# Altium PCB Lucido.PcbDoc
Units mm, origin at the board's own origin, x right, y up, seen from the top; angles counter-clockwise.
Board outline 50 x 50 mm, 4 copper layers (L1 (Signal), L2 (GND), L3 (GND), L4 (Signal)), stack 1.586 mm thick; 70 components, 50 nets, 241 pads, 202 vias.
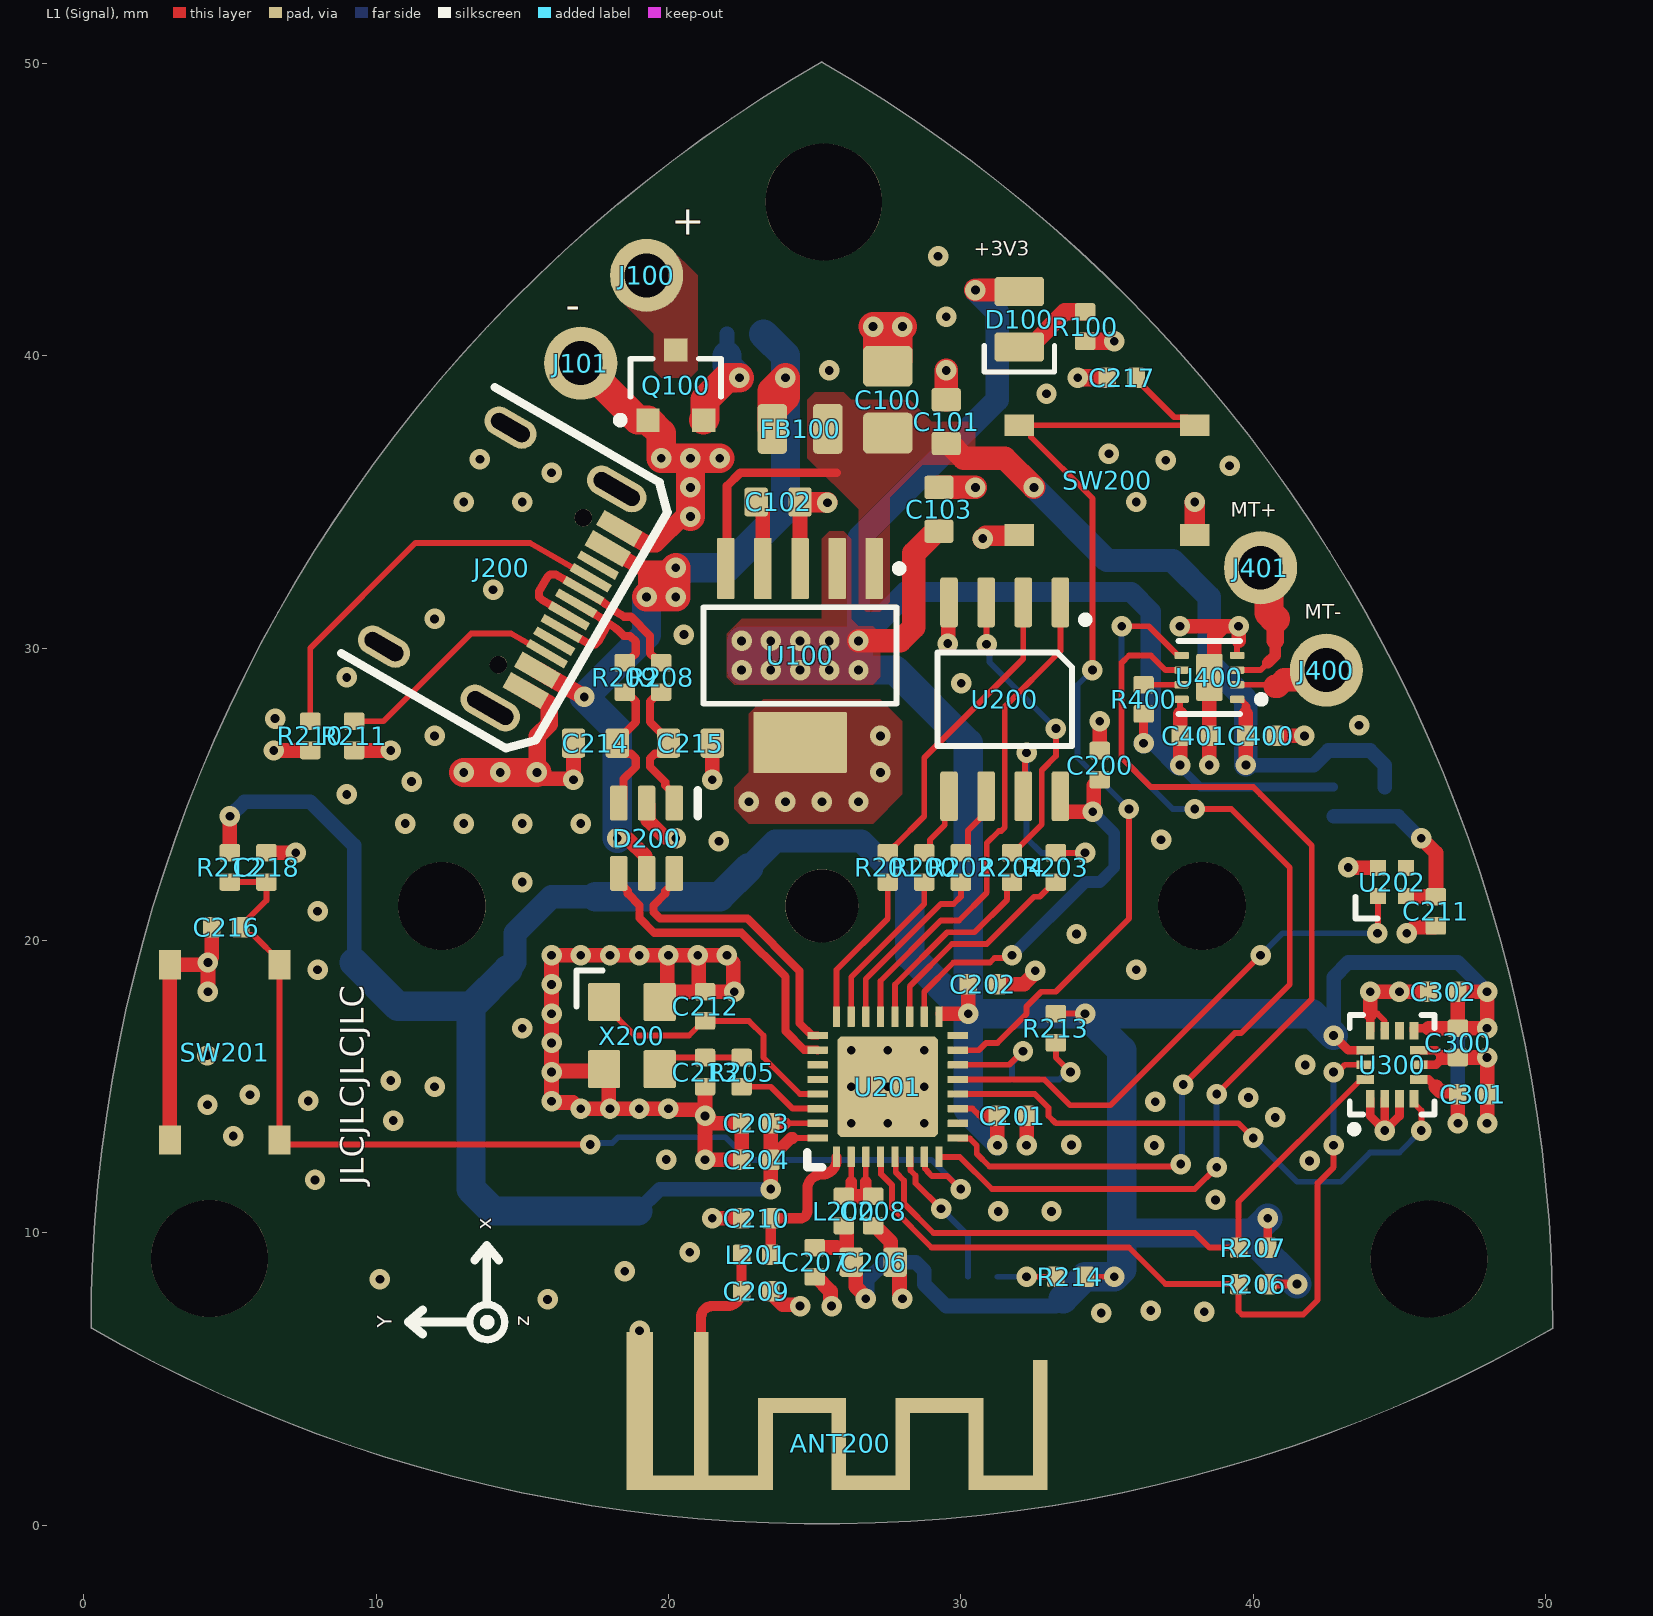
[diagram p0: L1 (Signal) view]
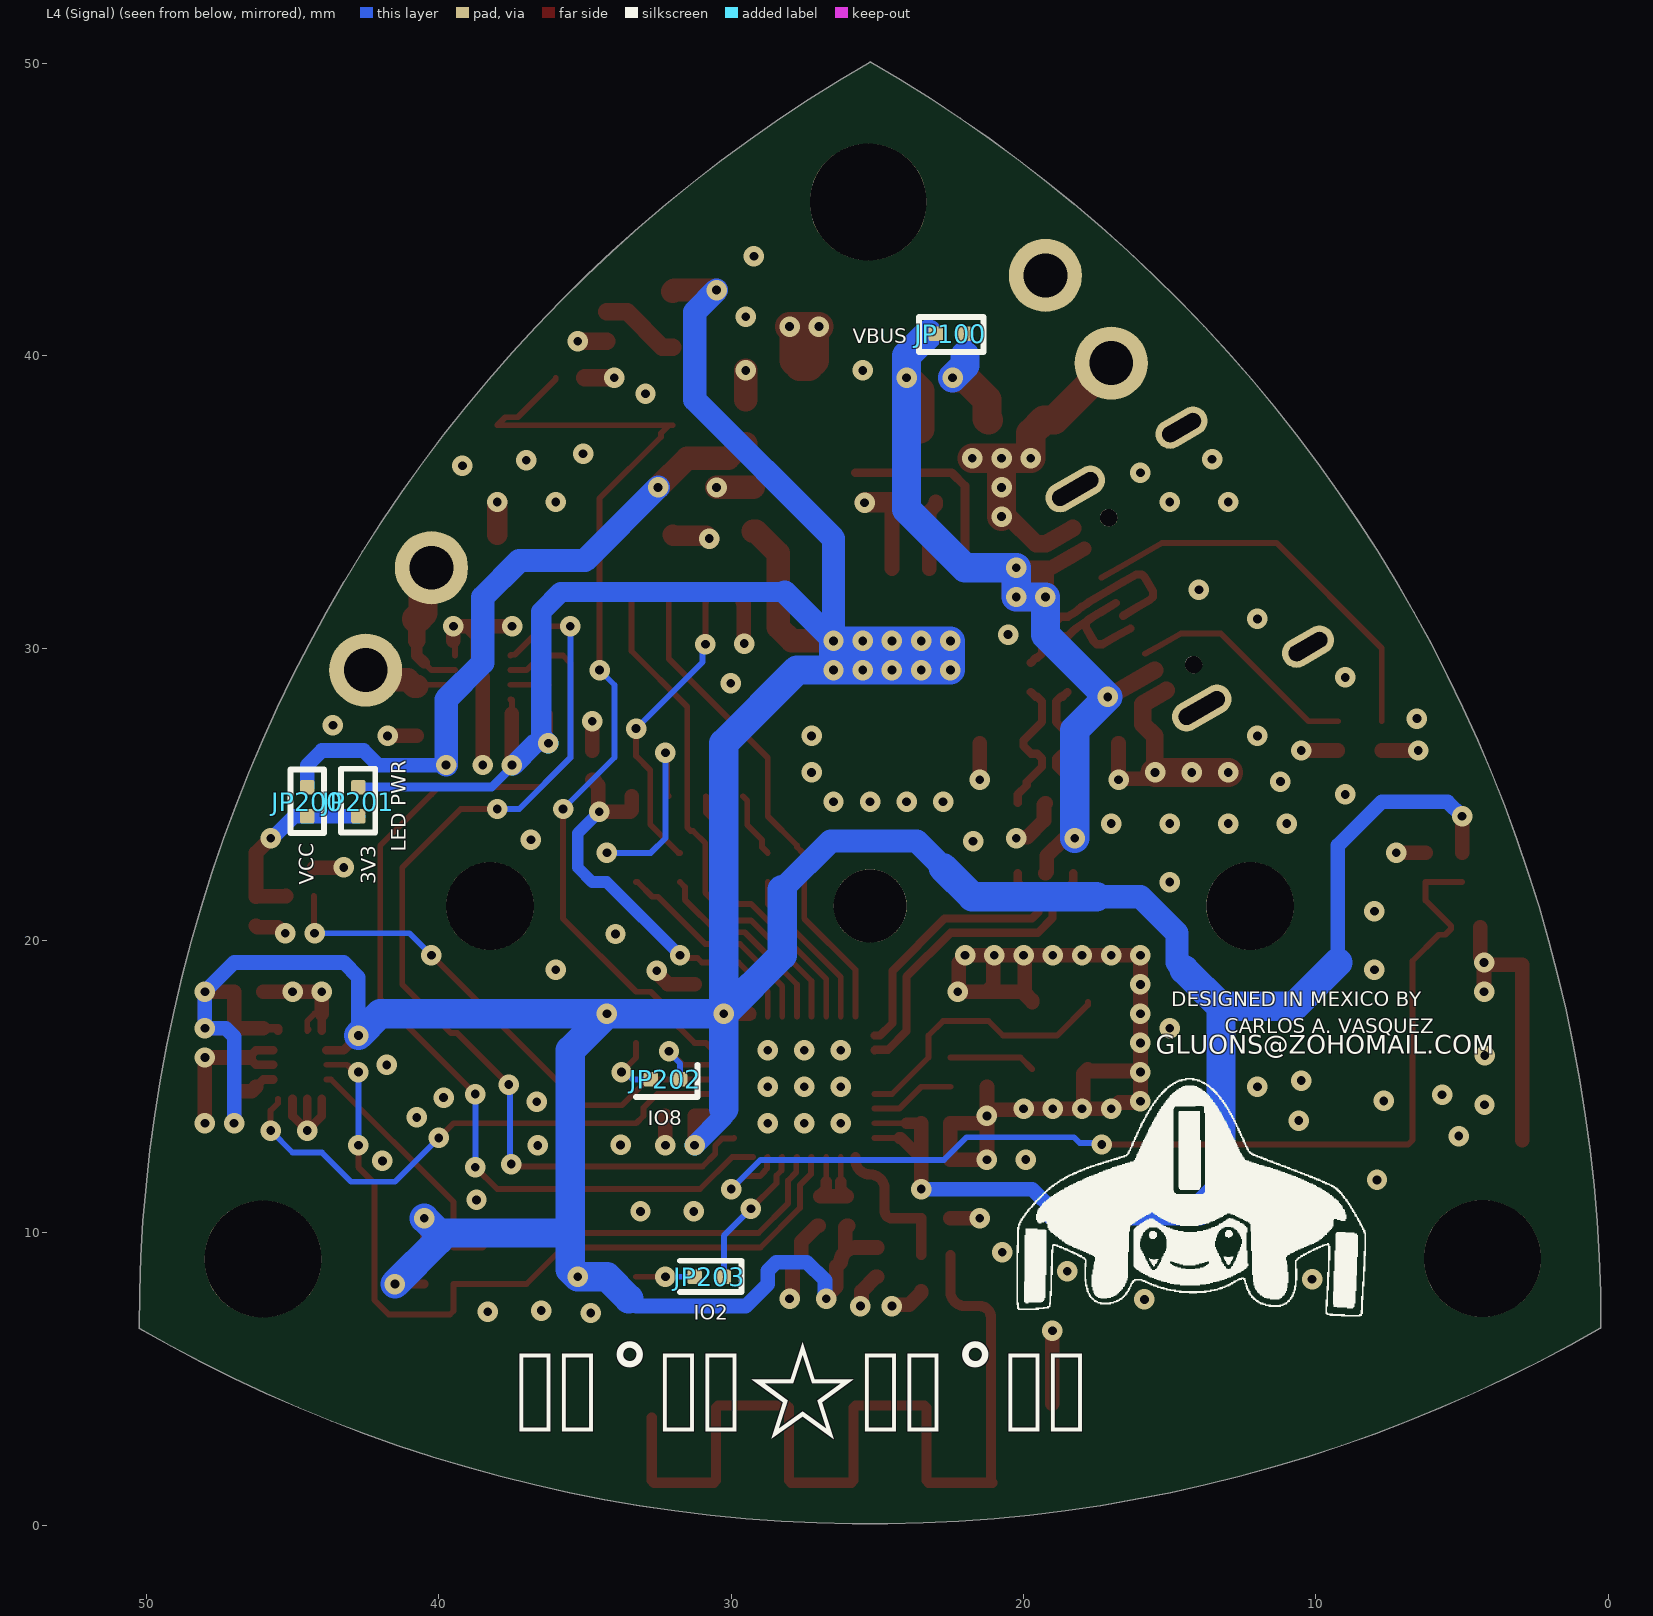
[diagram p1: L4 (Signal) view, seen from below]
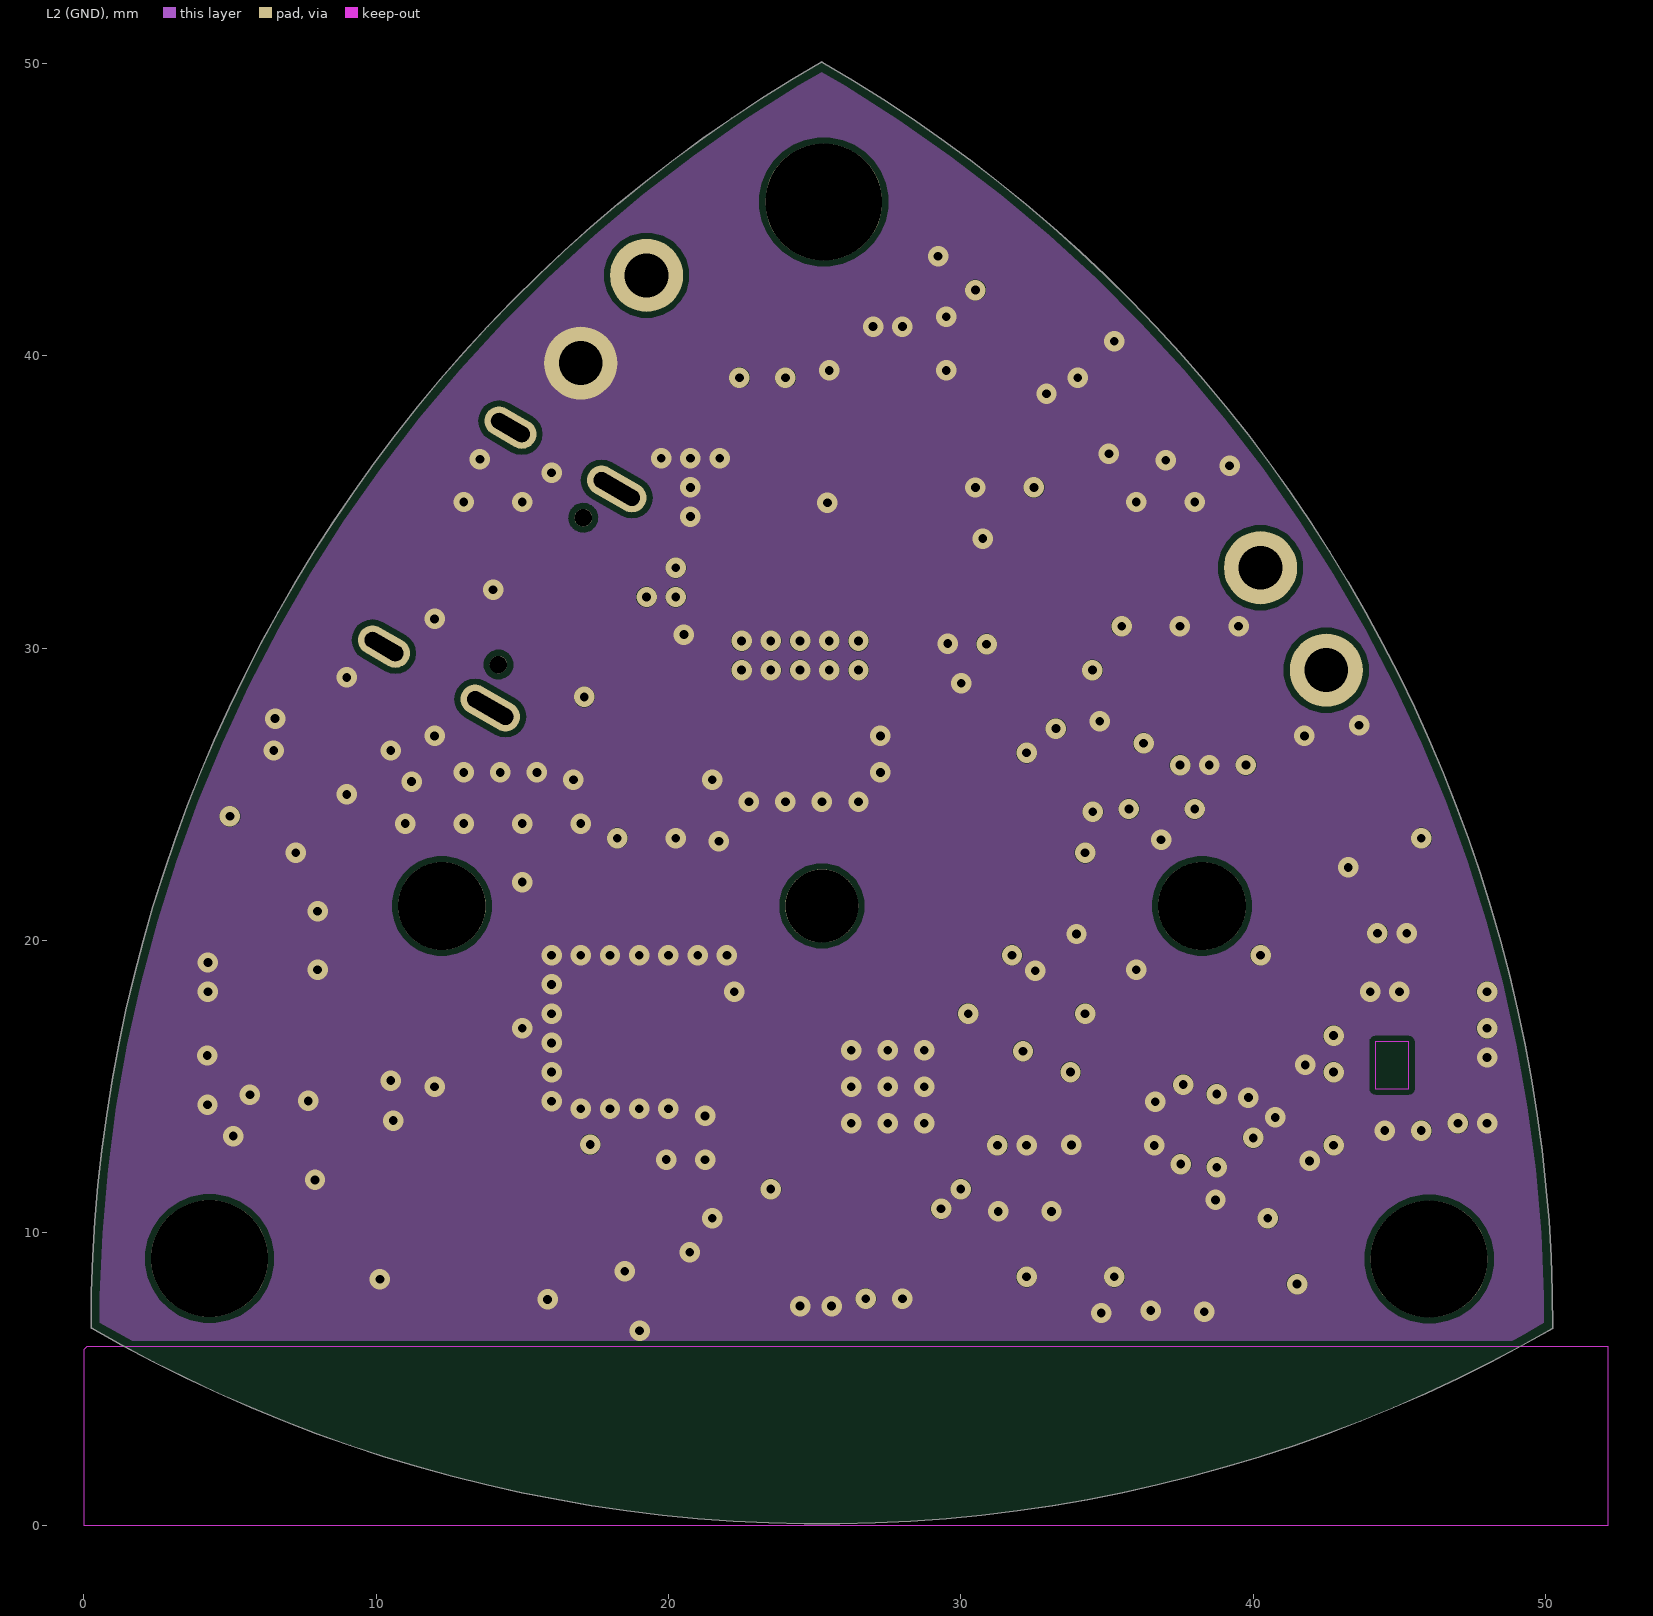
[diagram p2: L2 (GND)]
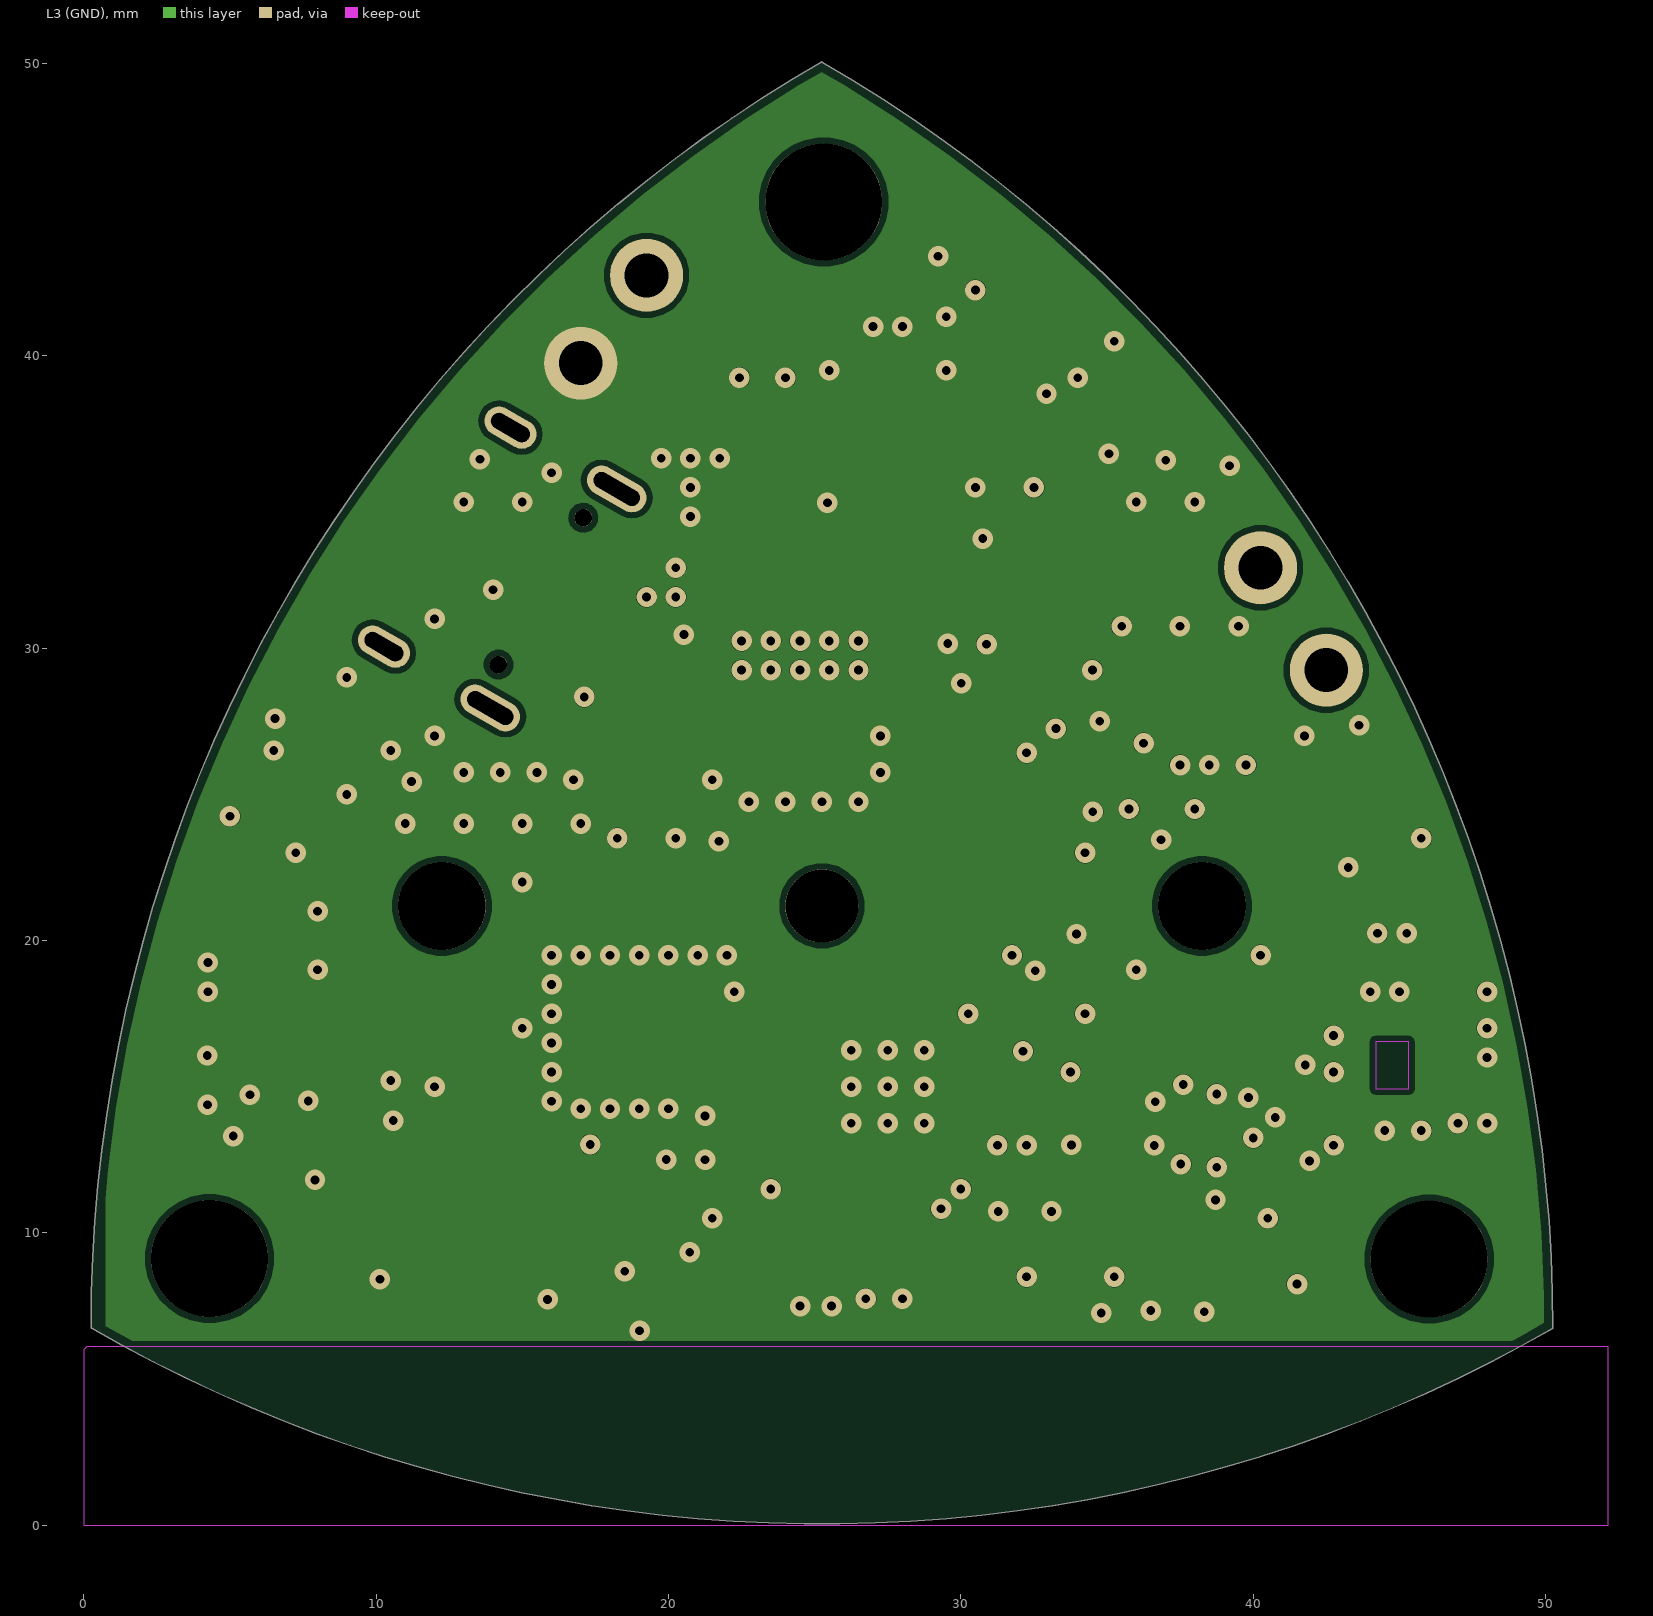
[diagram p3: L3 (GND)]
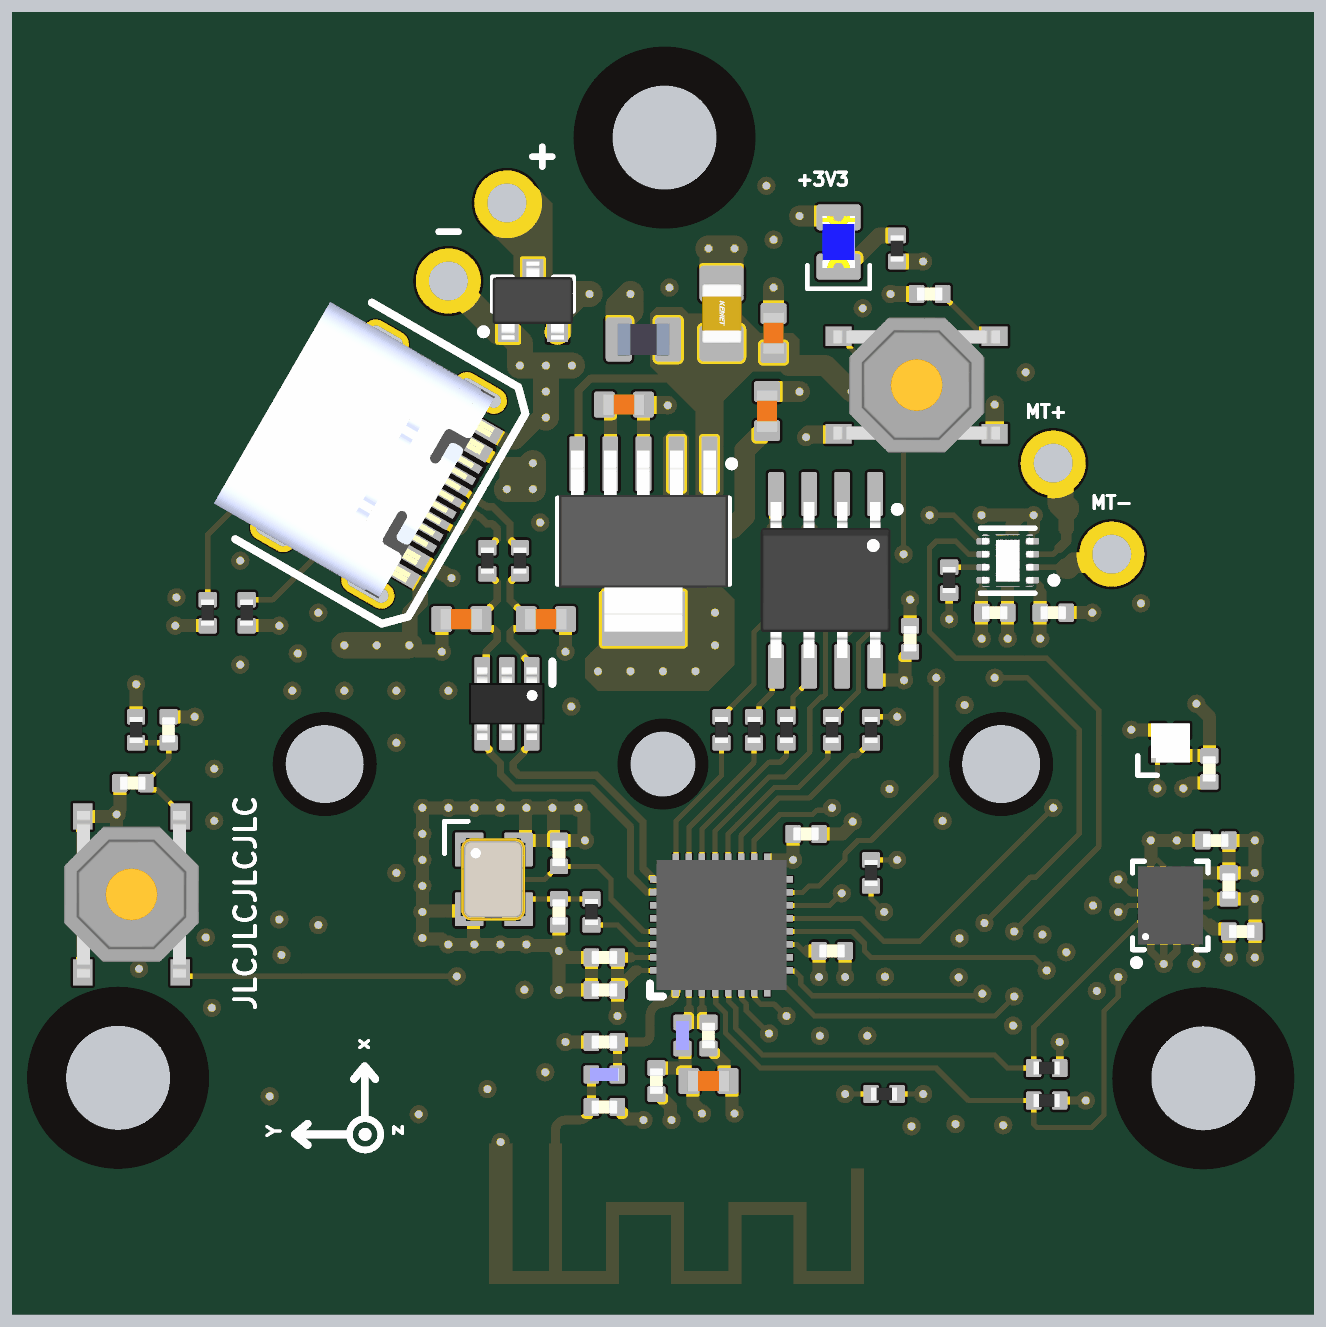
[diagram p4: 3D render of the assembled board from above, using the file's embedded part models]

## Layer stack, top to bottom
Top Solder: solder mask 0.0254, SM-001, Dk 4
L1 (Signal): signal copper 0.035
Dielectric 2: prepreg 0.2104, PP-017, Dk 4.4
L2 (GND): signal copper 0.0152
Dielectric 3: core 1.065, Core-039, Dk 4.6
L3 (GND): signal copper 0.0152
Dielectric 4: prepreg 0.2104, PP-017, Dk 4.4
L4 (Signal): signal copper 0.035
Bottom Solder: solder mask 0.0254, SM-001, Dk 4

## Board outline
0.25,6.745 cw(c50.25,6.758) 25.249,50.059 25.252,50.045 cw(c0.25,6.745) 50.25,6.745 cw(c25.258,50.042)

## Design rules (kind name [scope] priority, off if disabled: settings)
BoardOutlineClearance [All] p1: gap=0.3 ignorepadtopadclearanceinfootprint=FALSE
Clearance [All] p1: gap=0.2 ignorepadtopadclearanceinfootprint=FALSE except(0.127: SMDPad-SMDPad; 0.254: Arc-Via Track-Via Via-Via; 0.5: THPad-THPad)
ComponentClearance [All] p1: gap=0 collisioncheckmode=3 verticalgap=0 showdistances=FALSE donotcheckwithout3dbody=TRUE
DiffPairsRouting [InDifferentialPair('USB')] p1: maxlimit=0.254 minlimit=0.2 mostfreqgap=0.254 toplayer_mingap=0.203 toplayer_maxgap=0.203 toplayer_prefgap=0.203 toplayer_minwidth=0.281 toplayer_maxwidth=0.281 toplayer_prefwidth=0.281 bottomlayer_mingap=0.203 bottomlayer_maxgap=0.203 bottomlayer_prefgap=0.203 bottomlayer_minwidth=0.281 bottomlayer_maxwidth=0.281 bottomlayer_prefwidth=0.281 impedanceprofiledriven=TRUE impedanceprofileid={1997FC99-4100-4A1A-BC0C-2B6704AC8BC2} impedanceprofilevalue=90.000000 maxuncoupledlength=12.7
DiffPairsRouting DiffPairsRouting_1 [InDifferentialPair('USB_CONN')] p2: maxlimit=0.254 minlimit=0.203 mostfreqgap=0.254 toplayer_maxgap=0.203 toplayer_prefgap=0.203 toplayer_minwidth=0.281 toplayer_maxwidth=0.281 toplayer_prefwidth=0.281 bottomlayer_maxgap=0.203 bottomlayer_prefgap=0.203 bottomlayer_minwidth=0.281 bottomlayer_maxwidth=0.281 bottomlayer_prefwidth=0.281 impedanceprofiledriven=TRUE impedanceprofileid={1997FC99-4100-4A1A-BC0C-2B6704AC8BC2} impedanceprofilevalue=90.000000 maxuncoupledlength=12.7
DiffPairsRouting DiffPairsRouting_2 [InDifferentialPair('USB_RES')] p3: maxlimit=0.254 minlimit=0.203 mostfreqgap=0.254 toplayer_maxgap=0.203 toplayer_prefgap=0.203 toplayer_minwidth=0.281 toplayer_maxwidth=0.281 toplayer_prefwidth=0.281 bottomlayer_maxgap=0.203 bottomlayer_prefgap=0.203 bottomlayer_minwidth=0.281 bottomlayer_maxwidth=0.281 bottomlayer_prefwidth=0.281 impedanceprofiledriven=TRUE impedanceprofileid={1997FC99-4100-4A1A-BC0C-2B6704AC8BC2} impedanceprofilevalue=90.000000 maxuncoupledlength=12.7
HoleSize [All] p1: absolutevalues=TRUE maxlimit=6.3 minlimit=0.2 maxpercent=80.000 minpercent=20.000
MinimumSolderMaskSliver [All] p1: minsoldermaskwidth=0.08
PolygonConnect [All] p1: connectstyle=Direct reliefconductorwidth=0.254 reliefentries=4 polygonreliefangle="90 Angle" airgapwidth=0.254
RoutingVias [All] p1: holewidth=0.4 width=0.8 viastyle="Through Hole" minholewidth=0.3 minwidth=0.7 maxholewidth=6.3 maxwidth=6.7
SilkToSolderMaskClearance [IsPad] p1: minsilkscreentomaskgap=0.15 clearancetoexposedcopper=TRUE
SolderMaskExpansion [All] p1: expansion=0.102 istentingtop=FALSE
UnRoutedNet [All] p1: checkbadconnections=TRUE
Width "Antenna Width" [InNet('ANT')] p1: maxlimit=0.348 minlimit=0.254 preferedwidth=0.348 toplayer_minwidth=0.348 bottomlayer_minwidth=0.348 impedanceprofiledriven=TRUE impedanceprofileid={1F8402D1-BC79-406E-92C1-58D4C1B131FA} impedanceprofilevalue=50.000000 minimp=50.000000 maximp=50.000000 favimp=50.000000
Width "Antenna Width_1" [InNet('LNA_IN')] p2: maxlimit=0.348 minlimit=0.254 preferedwidth=0.348 toplayer_minwidth=0.348 bottomlayer_minwidth=0.348 impedanceprofiledriven=TRUE impedanceprofileid={1F8402D1-BC79-406E-92C1-58D4C1B131FA} impedanceprofilevalue=50.000000 minimp=50.000000 maximp=50.000000 favimp=50.000000
Width [All] p3: maxlimit=1 minlimit=0.127 preferedwidth=0.3 midlayer1_minwidth=0.254 midlayer1_maxwidth=0.254 midlayer1_prefwidth=0.254 midlayer2_minwidth=0.254 midlayer2_maxwidth=0.254 midlayer2_prefwidth=0.254 minimp=50.000000 maximp=50.000000 favimp=50.000000
24 further rules are at their usual default settings.

## Classes and differential pairs
differential pair USB: +USB_P -USB_N
differential pair USB_RES: +USB_RES_P -USB_RES_N
differential pair USB_CONN: +USB_CONN_P -USB_CONN_N

## Components (designator, comment, footprint, x,y, rotation, side; value= is the part's Value field where it differs from the comment)
ANT200 "PCB Antenna 2.4GHz 50Ohm" ANT_IFA_USB_2_4GHZ_50R 19.018,6.607 r0 top
C100 "10u" CAP_0805 27.5,38.5 r270 top
C101 "100n" CAP_0603 29.5,37.75 r270 top
C102 "100n" CAP_0603 23.75,35 r180 top
C103 "22u" CAP_0603 29.25,34.75 r270 top
C200 "1u" CAP_0402 34.75,26 r270 top
C201 "100n" CAP_0402 31.75,14 r0 top
C202 "100n" CAP_0402 30.75,18.5 r0 top
C203 "100n" CAP_0402 23,13.75 r180 top
C204 "100n" CAP_0402 23,12.5 r180 top
C206 "10u" CAP_0603 27,9 r0 top
C207 "100n" CAP_0402 25,9 r270 top
C208 "1u" CAP_0402 27,10.75 r90 top
C209 "3p3" CAP_0402 23,8 r180 top
C210 "3p3" CAP_0402 23,10.5 r0 top
C211 "100n" CAP_0402 46.25,21 r90 top
C212 "10p" CAP_0402 21.25,17.75 r90 top
C213 "10p" CAP_0402 21.25,15.5 r270 top
C214 "DNP" CAP_0603 17.5,26.75 r0 top
C215 "DNP" CAP_0603 20.75,26.75 r180 top
C216 "100n" CAP_0402 4.875,20.45 r180 top
C217 "100n" CAP_0402 35.5,39.25 r180 top
C218 "1u" CAP_0402 6.25,22.5 r270 top
C300 "100n" CAP_0402 47,16.5 r90 top
C301 "10n" CAP_0402 47.5,14.75 r180 top
C302 "2u2" CAP_0402 46.5,18.25 r0 top
C400 "100n" CAP_0402 40.25,27 r180 top
C401 "100n" CAP_0402 38,27 r180 top
D100 "BLUE" LED_0805_BLUE 32,41.25 r90 top
D200 "USBLC6-2SC6" SOT-23-6 19.25,23.5 r180 top
FB100 "100R @ 100 MHz" FB_0805 24.5,37.5 r0 top
J100 "VBAT" SOLDER_PIN_THT_1_5 19.25,42.75 r90 top
J101 "GND" SOLDER_PIN_THT_1_5 17,39.75 r90 top
J200 "TYPE-C-31-M-12" TYPE-C-31-M-12 14.25,32.75 r240 top
J400 "MT0_OUT1" SOLDER_PIN_THT_1_5 42.5,29.25 r90 top
J401 "MT0_OUT2" SOLDER_PIN_THT_1_5 40.25,32.75 r90 top
JP100 "Solder Jumper" SolderJumper_Single 22.5,40.75 r0 bottom
JP200 "Solder Jumper" SolderJumper_Single 44.5,24.75 r270 bottom
JP201 "Solder Jumper" SolderJumper_Single 42.75,24.75 r270 bottom
JP202 "Solder Jumper" SolderJumper_Single 32.25,15.25 r0 bottom
JP203 "Solder Jumper" SolderJumper_Single 30.75,8.5 r0 bottom
L200 "2n2" IND_0402 26,10.75 r90 top
L201 "2n2" IND_0402 23,9.25 r0 top
Q100 "AO3401A" AO-SOT-23-3L_V 20.25,39 r90 top
R100 "1k" RES_0402 34.25,41 r90 top
R200 "0" RES_0402 28.75,22.5 r90 top
R201 "0" RES_0402 27.5,22.5 r90 top
R202 "0" RES_0402 30,22.5 r90 top
R203 "0" RES_0402 33.25,22.5 r90 top
R204 "0" RES_0402 31.75,22.5 r90 top
R205 "22" RES_0402 22.5,15.5 r270 top
R206 "5k1" RES_0402 40,8.25 r0 top
R207 "5k1" RES_0402 40,9.5 r0 top
R208 "0" RES_0402 19.75,29 r90 top
R209 "0" RES_0402 18.5,29 r90 top
R210 "5k1" RES_0402 7.75,27 r90 top
R211 "5k1" RES_0402 9.25,27 r90 top
R212 "10k" RES_0402 5,22.5 r90 top
R213 "5k1" RES_0402 33.25,17 r90 top
R214 "5k1" RES_0402 33.75,8.5 r0 top
R400 "1k" RES_0402 36.25,28.25 r270 top
SW200 "SW SPST SMD Terreneitor" "SW SPST SMD Terreneitor" 35,35.75 r180 top
SW201 "SW SPST SMD Terreneitor" "SW SPST SMD Terreneitor" 4.822,16.174 r90 top
U100 "TPS73733DCQR" DCQ0006A_N 24.5,29.75 r270 top
U200 "W25Q128JVSIQ" "SOIC8_208 mil" 31.5,28.25 r270 top
U201 "ESP32-C3" QFN32-5x5 27.5,15 r90 top
U202 "SK6805-EC15" SK6805-EC15 44.75,22 r0 top
U300 "ICM-42688-P" "LGA14 (2.5mm x 3mm)" 44.75,15.75 r90 top
U400 "DRV8837DSGR" FP-DSG0008A-MFG 38.5,29 r180 top
X200 "40MHz" XTAL_3225 18.75,16.75 r270 top

## Footprints (in the part's own frame and the unit in brackets; to place one, negate y for a bottom-side part, rotate by r counter-clockwise, add the part's x,y. Pads: shape width x height; smd on the part's side, far side on the other; paste and mask are expansions set on the pad)
ANT_IFA_USB_2_4GHZ_50R [mm]
  rect 5x0.5 smd paste-2539.97 mask+0.102: 1(2.05,-5.15)
  rect 0.5x4.9 smd paste-2539.97 mask+0.102: 1(2.1,-2.45)
  rect 0.5x2.64 smd paste-2539.97 mask+0.102: 1(4.3,-3.58) 1(6.8,-3.58) 1(9,-3.58) 1(11.5,-3.58)
  rect 2x0.5 smd paste-2539.97 mask+0.102: 1(5.55,-2.51) 1(10.25,-2.51)
  rect 2.7x0.5 smd paste-2539.97 mask+0.102: 1(7.9,-5.15) 1(12.6,-5.15)
  rect 0.5x3.94 smd paste-2539.97 mask+0.102: 1(13.7,-2.93)
  rect 0.9x4.9 smd paste-2539.97 mask+0.102: 2(0,-2.45)
AO-SOT-23-3L_V [mm] "SOT23, 3-Leads, Body 3.1x1.8mm, Pitch 0.95mm"
  rect 0.8x0.8 smd: 1(-1.2,0.95) 2(-1.2,-0.95) 3(1.2,0)
  silkscreen extent -1.32,-1.55 0.9,2.02, body extent -1.5,-1.55 1.5,1.55, height 1.25
CAP_0402 [mm]
  rrect25% 0.6x0.7 smd: 1(-0.5,0) 2(0.5,0)
  body extent -0.5,-0.26 0.5,0.26, height 0.37
CAP_0603 [mm]
  rrect25% 0.8x1 smd: 1(-0.75,0) 2(0.75,0)
  body extent -0.8,-0.4 0.8,0.4, height 0.51
CAP_0805 [mm]
  rrect25% 1.4x1.7 smd: 1(-1.143,0) 2(1.143,0)
  body extent -1.15,-0.76 1.15,0.79, height 1.01
DCQ0006A_N [mm] "SOT223, 6-Leads, Body 6.55x3.55mm, Pitch 1.27mm, IPC Medium Density"
  rrect17% 2.1x0.6 smd: 1(-2.975,2.54) 2(-2.975,1.27) 3(-2.975,0) 4(-2.975,-1.27) 5(-2.975,-2.54)
  rrect5% 2.1x3.2 smd: 6(2.975,0)
  silkscreen extent -3.1,-3.3 1.65,3.52, body extent -3.48,-3.25 3.48,3.25, height 1.64
FB_0805 [mm]
  rrect25% 1x1.7 smd: 1(-0.95,0) 2(0.95,0)
  body extent -1,-0.63 1,0.63, height 0.86
FP-DSG0008A-MFG [mm]
  rrect40% 0.5x0.25 smd paste+0 mask+0: 1(-0.95,0.75) 2(-0.95,0.25) 3(-0.95,-0.25) 4(-0.95,-0.75) 5(0.95,-0.75) 6(0.95,-0.25) 7(0.95,0.25) 8(0.95,0.75)
  rrect11% 0.9x1.6 smd paste-1000 mask+0: 9(0,0)
  silkscreen extent -1.9,-1.25 1.05,1.25, body extent -1.3,-1.15 1.3,1.15, height 0.25
IND_0402 [mm]
  rrect25% 0.6x0.7 smd: 1(-0.5,0) 2(0.5,0)
  body extent -0.56,-0.26 0.56,0.26, height 0.67
LED_0805_BLUE [mm]
  rrect25% 1x1.7 smd: A(0.95,0) K(-0.95,0)
  silkscreen extent -1.8,-1.2 -0.9,1.2, body extent -1,-0.63 1,0.63, height 1.12
"LGA14 (2.5mm x 3mm)" [mm]
  rect 0.6x0.3 smd mask+0.051: 1(-1.162,0.75) 2(-1.162,0.25) 3(-1.162,-0.25) 4(-1.162,-0.75) 8(1.162,-0.75) 9(1.162,-0.25) 10(1.162,0.25) 11(1.162,0.75)
  rect 0.3x0.6 smd mask+0.051: 5(-0.5,-0.913) 6(0,-0.913) 7(0.5,-0.913) 12(0.5,0.913) 13(0,0.913) 14(-0.5,0.913)
  silkscreen extent -2.32,-1.45 1.7,1.45, body extent -1.5,-1.25 1.5,1.25, height 0.97
QFN32-5x5 [mm]
  rrect10% 0.7x0.25 smd mask+0.05: 1(-2.4,1.75) 2(-2.4,1.25) 3(-2.4,0.75) 4(-2.4,0.25) 5(-2.4,-0.25) 6(-2.4,-0.75) 7(-2.4,-1.25) 8(-2.4,-1.75) 17(2.4,-1.75) 18(2.4,-1.25) 19(2.4,-0.75) 20(2.4,-0.25) 21(2.4,0.25) 22(2.4,0.75) 23(2.4,1.25) 24(2.4,1.75)
  rrect10% 0.25x0.7 smd mask+0.05: 9(-1.75,-2.4) 10(-1.25,-2.4) 11(-0.75,-2.4) 12(-0.25,-2.4) 13(0.25,-2.4) 14(0.75,-2.4) 15(1.25,-2.4) 16(1.75,-2.4) 25(1.75,2.4) 26(1.25,2.4) 27(0.75,2.4) 28(0.25,2.4) 29(-0.25,2.4) 30(-0.75,2.4) 31(-1.25,2.4) 32(-1.75,2.4)
  rrect10% 3.45x3.45 smd mask+0.07: 33(0,0)
  silkscreen extent -2.75,2.25 -2.25,2.75, body extent -2.5,-2.5 2.5,2.5, height 0.85
RES_0402 [mm]
  rrect25% 0.6x0.7 smd: 1(-0.5,0) 2(0.5,0)
  body extent -0.5,-0.25 0.5,0.25, height 0.3
SK6805-EC15 [mm]
  rect 0.55x0.55 smd: 1(-0.475,-0.475) 2(0.475,-0.475) 3(0.475,0.475) 4(-0.475,0.475)
  silkscreen extent -1.25,-1.25 -0.5,-0.5, body extent -0.75,-0.75 0.75,0.75, height 0.65
"SOIC8_208 mil" [mm] "SOIC, 8-Leads, Body 4.91x3.90mm, Pitch 1.27mm, IPC Medium Density"
  rrect25% 1.7x0.6 smd: 1(-3.315,1.905) 2(-3.315,0.635) 3(-3.315,-0.635) 4(-3.315,-1.905) 5(3.315,-1.905) 6(3.315,-0.635) 7(3.315,0.635) 8(3.315,1.905)
  silkscreen extent -2.85,-2.3 1.6,2.88, body extent -3,-2.5 3,2.5, height 1.75
SOLDER_PIN_THT_1_5 [mm]
  round 2.5 hole 1.5: 1(0,0)
SolderJumper_Single [mm]
  rrect35% 0.5x0.5 smd mask+0: 1(-0.5,0) 2(0.5,0)
  silkscreen extent -1.13,-0.58 1.07,0.63
SOT-23-6 [mm]
  rrect25% 0.6x1.2 smd: 1(-0.95,-1.2) 2(0,-1.2) 3(0.95,-1.2) 4(0.95,1.2) 5(0,1.2) 6(-0.95,1.2)
  silkscreen extent -1.75,-1.63 -1.75,-0.76, body extent -1.45,-1.4 1.45,1.4, height 1.45
"SW SPST SMD Terreneitor" [mm] "SPST SW TS-1187A-B-A-B"
  rect 1x0.75 smd: 1(-3,1.875) 1(3,1.875) 2(-3,-1.875) 2(3,-1.875)
  body extent -3.2,-2.6 3.2,2.6, height 1.54
TYPE-C-31-M-12 [mm]
  rect 0.6x1.5 smd mask+0.07: A1B12(-3.2,2.85) B1A12(3.2,2.85)
  rect 0.6x1.5 smd mask+0.14: A4B9(-2.4,2.85) B4A9(2.4,2.85)
  rect 0.3x1.5 smd mask+0.14: A5(-1.25,2.85) A6(-0.25,2.85) A7(0.25,2.85) A8(1.25,2.85) B5(1.75,2.85) B6(0.75,2.85) B7(-0.75,2.85) B8(-1.75,2.85)
  round 0.6 hole 0.6 unplated mask+0.3: MH(-2.9,1.6) MH(2.9,1.6)
  oval 1x1.9 hole 0.55 slot 1.45 at 90 deg mask+0.05: SH(-4.325,-2.1) SH(4.325,-2.1)
  oval 1x2.2 hole 0.55 slot 1.75 at 90 deg mask+0.05: SH(-4.325,2.1) SH(4.325,2.1)
  silkscreen extent -5.25,-3.25 5.25,4, body extent -4.47,-4.65 4.47,3.26, height 3.32
XTAL_3225 [mm]
  rrect10% 1.3x1.1 smd: 1(-1.15,-0.95) 2(1.15,-0.95) 3(1.15,0.95) 4(-1.15,0.95)
  silkscreen extent -2.23,-1.89 -1,-1, body extent -1.6,-1.28 1.6,1.22, height 0.61

## Part data
ANT200: library part ANT_IFA_USB_2_4GHZ_50R, "Inverted F 2.4GHz ISM PCB Antenna 50 Ohm", ComponentLink1Description=Datasheet, ComponentLink1URL=https://www.ti.com/lit/an/swra117d/swra117d.pdf
C100: library part CAP_0805, "Capacitor SMD 0805"
C101 C102 C103 C206 C214 C215: library part CAP_0603, "Capacitor SMD 0603"
C200 C201 C202 C203 C204 C207 C208 C209 C210 C211 C212 C213 C216 C217 C218 C300 C301 C302 C400 C401: library part CAP_0402, "Capacitor SMD 0402"
D100: library part LED_0805_BLUE, "LED 0805 BLUE SMD"
D200: "Low-Capacitance ESD Protection USB", Manufacturer=STMicroelectronics, Distributor Link=https://www.mouser.de/ProductDetail/STMicroelectronics/USBLC6-2SC6?qs=po45yt2pPpu%2FhNIlwQdTlg%3D%3D, Manufacturer Part Number=USBLC6-2SC6
FB100: library part FB_0805, "Ferrite Bead SMD 0805"
J100 J101 J400 J401: library part SOLDER_PIN_THT, "Solder Pin 1.5mm Through-Hole"
J200: "USB Type C Connector Horizontal SMT", Manufacturer="Koren Hroparts", Manufacturer Part Number=TYPE-C-31-M-12
JP100 JP200 JP201 JP202 JP203: library part SolderJumper_Single, "Solder Jumper Single 0.5mm Pitch"
L200 L201: library part IND_0402, "Inductor SMD 0402"
Q100: library part CMP-2000-05778-1, "P-Channel MOSFET, 30 V, 4 A, -55 to 150 degC, 3-Pin SOT-23-3L, RoHS, Tape and Reel", Continuous Drain Current=4A, Drain-Source On-Volt=30V, Frequency (Max)=NotRequiredMHz, Gate-Source Voltage (Max)=?12V, Manufacturer="Alpha and Omega", Operating Temp Range=-55Cto150C, Operating Temperature Classification=Military, Output Power (Max)=NotRequiredW, Package Description="3-Pin Small Outline Transistor, Body 2.95 x 1.6 mm, Pitch 0.95 mm", Package Reference=SOT-23-3L, Package Type=SOT-23, Power Dissipation=1.4W, Power Gain=NotRequireddB, Channel Mode=Enhancement, Datasheet URL=http://www.aosmd.com/res/data_sheets/AO3401A.pdf, Datasheet Version="Rev. 3, 03/2011", Drain Current (Max)=4A, Drain Efficiency=NotRequired%, Drain-Source On-Res=0.044ohm, Manufacturer URL=http://www.aosmd.com/, Mounting=SurfaceMount, Mounting Technology=SurfaceMount, Noise Figure=NotRequireddB, Number of  Elements=1, Package URL=http://www.aosmd.com/res/packaging_information/SOT-23-3L.pdf, Pin Count=3, Polarity=P, Rad Hardened=No, Type=PowerMOSFET
R100 R200 R201 R202 R203 R204 R205 R206 R207 R208 R209 R210 R211 R212 R213 R214 R400: library part RES_0402, "Resistor SMD 0402"
SW200 SW201: "SPST SW TS-1187A-B-A-B"
U100: library part CMP-0395-00300-2, "Single Output LDO, 1 A, Fixed 3.3 V Output, 2.2 to 5.5 V Input, with Reverse Current Protection, 6-pin SOT-223 (DCQ), -40 to 125 degC, Green (RoHS & no Sb/Br)", Manufacturer="Texas Instruments", Rating=Catalog, Accuracy(%)=3, ComponentLink1Description="Manufacturer URL", ComponentLink1URL=http://www.ti.com/, ComponentLink2Description=Datasheet, ComponentLink2URL=http://www.ti.com/general/docs/lit/getliterature.tsp?genericPartNumber=TPS73733&fileType=pdf, ComponentLink3Description="Package Specification", ComponentLink3URL=http://www.ti.com/litv/pdf/mpds098c, DatasheetVersion=SBVS067O, Eco-Plan="Green (RoHS & no Sb/Br)", Fixed Output Options(V)=3.3, Iout(Max)(A)=1, Iq(Typ)(mA)=0.3, Mounting Technology="Surface Mount", PackageDescription="6-Pin Plastic Small Outline, Body 3.5 x 6.5 mm, Pitch 1.27 mm", PackageReference=DCQ0006A, PackageVersion=4202109/D, PartNumber=TPS73733DCQR, SubFamily="Single Channel LDO", Vdo(Typ)(mV)=130, Vin(Max)(V)=5.5, Vin(Min)(V)=2.2, Vout Adj(Max)(V)=3.3, Vout Adj(Min)(V)=3.3
U200: "128M-BIT / SERIAL FLASH MEMORY WITH / DUAL/QUAD SPI & QPI & DTR SOIC-8 208 MIL", Manufacturer=Winbond, Manufacturer Part Number=W25Q128JVSIM
U201: "Ultra­Low­Power SoC with RISC­V Single­Core CPU Supporting IEEE 802.11b/g/n (2.4 GHz Wi­Fi) and Bluetooth® 5 (LE)", LCSC=C2838500, Manufacturer=Espressif, Manufacturer Part Number=ESP32-C3
U300: "6-axis MEMS IMU (Accelerometer & Gyroscope)"
U400: library part CMP-04915-000004-1, "IC MOTOR DRIVER PAR 8WSON", Ambient Temperature Range High=+85°C, Ambient Temperature Range Low=-40°C, Manufacturer="Texas Instruments", Max Junction Temp=+150°C, Max Supply Voltage=7V, Min Supply Voltage=1.8V, Nominal Supply Current=300-700uA, Output Current=1.8A, Output Voltage=0-11V, Package=DSG0008A, Switching Frequency=0-250kHz, Temperature="-40°C to +85°C", Automotive=No, Category=IC, ComponentLink2Description=Datasheet, ComponentLink2URL=http://www.ti.com/lit/ds/symlink/drv8837.pdf, Device Class L1="Integrated Circuits (ICs)", Device Class L2="Power Management ICs", Device Class L3="Motor Drivers", Digikey Description="IC MOTOR DRIVER PAR 8WSON", Height=0.8mm, Lead Free=Yes, Manufacturer Part Number=DRV8837DSGR, Motor Type=Brushed, Mouser Description="Motor / Motion / Ignition Controllers & Drivers 1.8A Low Vltg Brush DC Motor Driver", Number Of Outputs=2, Octopart=https://octopart.com/drv8837dsgr-texas+instruments-23786726, RoHS=TRUE, Standoff Height=0mm, Temperature Range High=+85°C, Temperature Range Low=-40°C
X200: library part TSX-3225_24.0000MF15X-AC, "Crystal SMD 40MHz 10PPM 12pF 3225", Manufacturer=Epson, Manufacturer Part Number="TSX-3225 24.0000MF15X-AC"

## Free pads (board coordinates)
  round 4 hole 4 unplated mask+1.5: MH(4.306,9.125) MH(25.311,45.263) MH(46.019,9.106)
  round 3 hole 3 unplated mask+0.5: MH(12.249,21.183) MH(38.249,21.183)
  round 2.5 hole 2.5 unplated mask+0.5: MH(25.249,21.183)

## Via types
v1: diameter 0.7, hole 0.3, L1 (Signal) to L4 (Signal), tented both sides, 202 vias

## Nets (pads, with @x,y where several pads share a name; then routed paths per layer and width w, separated by ;. In a path a pad name is that pad's centre, name@x,y a point inside that pad or via, vN(x,y) a via of type N, cw(c..) or ccw(c..) an arc to the next point about the centre after c; other vN are vias at no path point)
3V3: C103.2 C201.1 C202.1 C203.1 C204.1 C206.1 C207.1 C300.2 C301.2 C302.2 C401.2 D100.A JP201.1 L200.1 R206.2 R207.2 R212.2 R213.2 R214.2 R400.2 U100.2 U201.11 U201.17 U201.31 U201.32 U300.5 U300.8 U300.12 U400.8 | length 217.2
  L1 (Signal) w0.2: 24,13.75 U201.31 ; 24.25,13.25 U201.32 ; U201.17 29.25,17.475 29.275,17.5 29.388,17.5 ; U201.11 30.396,14.25 30.625,14.021 ; R213.2 v1(34.25,17.5) ; R214.2 v1(35.25,8.5) ; 37.5,27.75 37.5,28.225 37.525,28.25 U400.8
  L1 (Signal) w0.3: v1(36.25,26.75) R400.2 ; R206.2 v1(41.5,8.25) ; R207.2 v1(40.5,10.5) ; v1(42.75,16.75) 43.25,16.25 U300.12 ; U300.8 45.5,17 46,17 ; U300.5 46,15.25 46.25,15
  L1 (Signal) w0.4: C204.1 23.5,12.55 24.2,13.25 24.25,13.25 ; C203.1 24,13.75
  L1 (Signal) w0.5: R212.2 v1(5,24.25) ; v1(23.5,11.5) C204.1 ; C204.1@23.5,12.55 C203.1 ; C207.1 25.75,9.5 cw(c25.75,9) C206.1@26.1,9.357 ; L200.1 26.05,10.25 26.1,10.2 C206.1@26.1,9.357 ; v1(26.75,7.75) 26.75,7.804 26.4,8.154 26.4,8.85 C206.1 ccw(c25.75,9) C206.1@26.1,9.357 ; 29.388,17.5 v1(30.25,17.5) C202.1 ; 30.854,14 C201.1 v1(31.25,13) ; v1@35.222,8.472 v1(35.25,8.5) ; v1(37.5,26) C401.2 37.5,27.75 ; 46,17 C300.2 ; 46.25,15 46.4,14.85 46.95,14.85 47,14.8 C301.2 v1(47,13.75) ; C300.2 C302.2 v1(48,18.25) v1(48,17) C300.2
  L1 (Signal) w0.8: v1(26.5,30.25) 27.922,30.25 28.39,30.719 28.39,33.24 29.15,34 C103.2 ; v1(30.5,42.25) 31.95,42.25 D100.A
  L4 (Signal) w0.3: v1(37.5,26) 37.5,25.938 38.188,25.25 JP201.1
  L4 (Signal) w0.5: v1(5,24.25) 5.5,24.75 7.75,24.75 9.25,23.25 9.25,19.25 ; 18.957,10.75 19.707,11.5 v1(23.5,11.5) ; v1(26.75,7.75) 26.788,7.788 26.788,8.379 27.409,9 28.457,9 28.75,8.707 28.75,8.25 29.5,7.5 33.25,7.5 33.5,7.75 ; v1(36.25,26.75) 36.288,26.712 36.734,26.712 ; v1@37.446,26 v1(37.5,26) ; v1@42.804,16.75 v1(42.75,16.75) 42.75,18.75 43.25,19.25 47,19.25 v1(48,18.25) v1(48,17) 47.293,17 47,16.707 v1(47,13.75)
  L4 (Signal) w0.7: 28.172,31.922 35.828,31.922 36.5,31.25 36.5,27 v1(36.25,26.75) ; 30.25,14.25 30.25,14 v1(31.25,13) ; 36.734,26.712 v1@37.446,26
  L4 (Signal) w0.8: 14.5,19 14.75,19.25 14.75,20.25 16,21.5 17.5,21.5 ; 22.75,22.5 23.655,23.405 26.595,23.405 28.25,21.75 ; 28.172,31.922 v1(26.5,30.25) 26.5,33.75 31.25,38.5 31.25,41.5 v1(30.5,42.25)
  L4 (Signal) w1: 9.25,19.25 10.75,17.75 13.25,17.75 ; 14.5,19 13.25,17.75 ; 17.5,21.5 21.75,21.5 22.75,22.5 ; 18.957,10.75 14,10.75 13.25,11.5 13.25,17.75 ; 28.25,21.75 28.25,19.5 v1(30.25,17.5) ; 30.25,14.25 v1(30.25,17.5) ; 33.5,7.75 34.25,8.5 v1(35.25,8.5) 35.5,8.75 35.5,10 ; v1(40.5,10.5) 40,10 ; v1(41.5,8.25) 40,9.75 40,10 ; v1(42.75,16.75) 42,17.5 v1(34.25,17.5) ; v1(23.5,29.25) v1(23.5,30.25) ; v1(23.5,29.25) v1(24.5,29.25) ; v1(23.5,29.25) v1(22.5,29.25) v1(22.5,30.25) v1(23.5,30.25) ; v1(23.5,30.25) v1(24.5,30.25) ; v1(24.5,29.25) v1(24.5,30.25) ; v1(24.5,29.25) v1(25.5,29.25) ; v1(24.5,30.25) v1(25.5,30.25) ; v1(25.5,29.25) v1(25.5,30.25) ; v1(25.5,29.25) v1(26.5,29.25) ; v1(25.5,30.25) v1(26.5,30.25) v1(26.5,29.25) ; v1(26.5,29.25) 27.75,29.25 30.25,26.75 v1(30.25,17.5) ; v1(30.25,17.5) v1(34.25,17.5) ; v1(34.25,17.5) 35.5,16.25 35.5,10 ; 35.5,10 40,10
ANT: ANT200.1 C209.2 L201.1 | length 32.8
  L1 (Signal) w0.348: L201.1 C209.2 cw(c22,8) 22,7.5 21.5,7.5 ccw(c21.5,7.118) 21.118,7.118 21.118,4.157 21.118,1.507 21.068,1.457 23.242,1.457 23.318,1.532 23.318,3.027 23.318,4.021 23.393,4.097 24.568,4.097 25.742,4.097 25.818,4.021 25.818,3.027 25.818,1.532 25.893,1.457 26.918,1.457 27.942,1.457 28.018,1.532 28.018,3.027 28.018,4.021 28.093,4.097 29.268,4.097 30.442,4.097 30.518,4.021 30.518,3.027 30.518,1.532 30.593,1.457 31.618,1.457 32.642,1.457 32.718,1.532 ANT200.1@32.718,3.677
CC1: J200.A5 R210.2 | length 13.9
  L1 (Signal) w0.2: R210.2 7.75,30 11.351,33.601 15.268,33.601 16.779,32.73 J200.A5
CC2: J200.B5 R211.2 | length 8
  L1 (Signal) w0.2: R211.2 10.25,27.5 13.253,30.503 14.615,30.503 15.273,30.122 J200.B5
CHIP_EN: C216.1 C218.2 R212.1 SW201.2 U201.7 | length 37.3
  L1 (Signal) w0.2: R212.1 C218.2 6.25,21.375 5.375,20.5 C216.1 5.375,20.4 5.575,20.2 5.796,20.2 6.697,19.299 6.697,19.174 6.697,13.174 6.846,13.025 v1(17.325,13.025) ; U201.7 28.775,12.575 28.775,12.202 28.85,12.127 28.85,12.108 29.008,11.95 29.531,11.95 29.981,11.5 v1(30,11.5)
  L4 (Signal) w0.2: v1(17.325,13.025) 17.375,13.075 18.075,13.075 18.271,13.271 21.95,13.271 22.721,12.5 29,12.5 v1(30,11.5)
GND: ANT200.2 C100.1 C101.1 C102.1 C103.1 C200.1 C201.2 C202.2 C203.2 C204.2 C206.2 C207.2 C208.1 C209.1 C210.1 C211.1 C212.2 C213.2 C214.1 C215.1 C216.2 C217.2 C218.1 C300.1 C301.1 C302.1 C400.1 C401.1 D200.2 J101.1 J200.A1B12 J200.B1A12 Q100.1 R100.1 R210.1 R211.1 SW200.1 SW201.1 U100.3 U100.6 U200.4 U201.33 U202.4 U300.1 U300.2 U300.3 U300.6 U300.7 U300.10 U300.11 U400.4 U400.9 X200.2 X200.4 | length 122.2
  L1 (Signal) w0.2: U400.4 39.45,30.2 39.5,30.25 ; 44,17.5 44.25,17.5 44.5,17.25 U300.10 U300.10@44.45,16.962
  L1 (Signal) w0.3: U300.1 44,14 v1(44.5,13.5) ; U300.11 44,17.5 ; U300.2 v1(44.5,13.5) ; U300.3 45,14 v1(44.5,13.5) ; U300.6 46.25,15.75 46.5,16 46.25,16.25 U300.7
  L1 (Signal) w0.5: SW201.1@2.947,13.174 2.947,19.174 4.12,19.174 4.196,19.25 v1(4.25,19.25) ; v1(4.25,18.25) v1(4.25,19.25) ; C216.2 4.375,19.429 4.25,19.304 v1(4.25,19.25) ; C218.1 v1(7.25,23) ; v1(6.5,26.5) R210.1 ; R211.1 v1(10.5,26.5) ; v1(15.5,25.75) 15.554,25.75 15.766,25.538 16.712,25.538 v1(16.75,25.5) C214.1 ; v1(19.011,6.656) 19.014,6.653 19.014,4.16 ANT200.2 ; D200.2 19.3,24.65 19.3,24.108 19.869,23.538 20.212,23.538 v1(20.25,23.5) ; C213.2 v1(21.25,14) ; v1(21.5,10.5) C210.1 ; v1(21.5,25.5) C215.1 ; C209.1 23.5,7.95 23.912,7.538 24.462,7.538 v1(24.5,7.5) ; U100.3 C102.1 C102.1@24.514,34.986 ; C207.2 25.05,8.5 25.541,8.009 25.541,7.538 v1(25.579,7.5) ; v1@25.423,34.986 v1(25.437,34.972) ; C208.1 27.05,10.25 27.6,9.7 27.6,9.15 27.9,8.85 27.9,7.904 28,7.804 v1(28,7.75) ; v1(29.554,30.16) 29.575,30.18 29.575,31.545 U200.4 ; C202.2 32.158,18.5 32.5,18.842 32.5,18.873 32.544,18.917 v1(32.544,18.971) ; v1(32.25,13) C201.2 ; C200.1 v1(34.75,27.5) ; v1(37.492,30.75) v1(39.5,30.75) 39.5,30.25 ; v1(38.5,26.004) C401.1 U400.9 38.669,29.169 38.669,30.419 38.962,30.712 ; C400.1 v1(41.75,27) ; v1(43.25,22.5) 43.262,22.488 44.262,22.488 U202.4 ; 44,17.5 v1(44,18.25) v1(45,18.25) C302.1 ; v1(45.25,20.25) 45.304,20.25 45.504,20.45 46.2,20.45 C211.1 ; 46.5,16 C300.1 v1(48,16) C301.1 v1(48,13.75) ; v1(16,15.5) 16.038,15.538 17.738,15.538 X200.2 17.962,15.438 17.962,14.288 v1(18,14.25) ; v1(16,15.5) v1(16,14.5) 16.038,14.462 16.734,14.462 16.946,14.25 v1(17,14.25) v1(18,14.25) ; v1(16,15.5) v1(16,16.5) v1(16,17.5) v1(16,18.5) v1(16,19.5) v1(17,19.5) v1(18,19.5) v1(19,19.5) v1(20,19.5) ; v1(18,14.25) v1(19,14.25) v1(20,14.25) 20.038,14.212 20.984,14.212 21.196,14 v1(21.25,14) ; X200.4@19.962,18.212 19.962,18.162 X200.4 19.7,17.95 X200.4@19.962,18.212 ; X200.4@19.962,18.212 19.962,19.462 v1(20,19.5) ; X200.4@19.962,18.212 20,18.25 C212.2@21.2,18.25 ; v1(20,19.5) v1(21,19.5) ; v1(21,19.5) 21.038,19.462 21.038,18.462 21.15,18.35 21.15,18.3 C212.2@21.2,18.25 ; v1(21,19.5) v1(22,19.5) 22,19.446 22.212,19.234 22.212,18.288 v1(22.25,18.25) C212.2 C212.2@21.2,18.25 ; v1(21.25,14) v1(21.25,12.5) C204.2 C203.2 21.554,13.75 21.304,14 v1(21.25,14)
  L1 (Signal) w0.6: J200.B1A12 15.925,28.083 15.925,27.402 15.519,26.996 15.519,25.769 v1(15.5,25.75) ; J200.A1B12 19.237,33.569 19.569,33.569 20.504,34.504 v1@20.588,34.504 ; v1(34,39.25) C217.2 ; R100.1 v1(35.25,40.5)
  L1 (Signal) w0.7: C102.1@24.514,34.986 v1@25.423,34.986 ; v1(30.75,33.75) 30.85,33.85 31.975,33.85 SW200.1@32,33.875 ; SW200.1@38,33.875 v1(38,35)
  L1 (Signal) w0.8: C103.1 30.496,35.5 v1(30.5,35.496) ; C101.1 v1(29.5,39.5)
  L1 (Signal) w1: v1(13,25.75) v1(14.25,25.75) v1(15.5,25.75) ; J101.1 18.95,37.8 Q100.1 19.75,37.35 v1(19.75,36.5) v1(20.75,36.5) ; v1(20.75,34.5) v1(20.75,35.5) v1(20.75,36.5) ; v1(21.75,36.5) v1(20.75,36.5) ; v1(27,41) v1(28,41) 27.85,40.85 27.85,39.843 27.65,39.643 C100.1 27.35,39.643 27.15,39.843 27.15,40.85 v1(27,41)
  other v1: 34.805,7.261 38.326,7.303 36.496,7.345 15.864,7.724 10.132,8.417 18.502,8.69 20.725,9.338 31.282,10.737 33.101,10.737 38.71,11.13 7.911,11.813 41.927,12.461 19.923,12.507 36.617,12.991 33.784,13.009 5.112,13.311 26.25,13.75 27.5,13.75 28.75,13.75 10.586,13.844 40.753,13.95 4.233,14.387 36.65,14.488 7.676,14.514 39.835,14.629 5.685,14.726 12,15 26.25,15 27.5,15 28.75,15 10.501,15.21 41.78,15.747 4.221,16.069 26.25,16.25 27.5,16.25 28.75,16.25 15,17 8,19 36,19 33.956,20.225 8,21 15,22 21.725,23.393 36.848,23.451 11,24 13,24 15,24 17,24 22.75,24.75 24,24.75 25.25,24.75 26.5,24.75 9,25 11.214,25.437 27.25,25.75 12,27 27.25,27 43.622,27.363 6.547,27.591 30.012,28.798 9,29 20.53,30.465 12,31 14,32 13,35 15,35 36,35 16,36 39.192,36.243 37.011,36.43 13.551,36.461 35.064,36.648 32.93,38.704 25.499,39.499 29.503,41.337 29.222,43.409
GPIO2: JP203.1 U201.6 | length 4.9
  L1 (Signal) w0.2: U201.6 28.275,12.575 28.275,12.137 28.45,11.962 28.45,11.701 v1(29.325,10.825)
  L4 (Signal) w0.2: v1(29.325,10.825) 30.25,9.901 JP203.1
GPIO8: JP202.1 U201.14 | length 3.5
  L1 (Signal) w0.2: U201.14 31.658,15.75 v1(32.126,16.218)
  L4 (Signal) w0.2: JP202.1 31.75,15.8 32.126,16.176 v1(32.126,16.218)
GPIO9: C217.1 SW200.2 U201.15 | length 35.4
  L1 (Signal) w0.2: U201.15 30.615,16.25 30.865,16.5 31.25,16.5 32.25,17.5 32.25,17.75 32.75,18.25 33.25,18.25 35.75,20.75 v1(35.75,24.5) ; SW200.2@32,37.625 SW200.2@32.125,37.625 ; v1(34.5,29.25) 34.5,35.125 32.4,37.225 32.4,37.35 SW200.2@32.125,37.625 ; C217.1 36,39.2 37.3,37.9 37.725,37.9 38,37.625 SW200.2@32.125,37.625
  L4 (Signal) w0.2: v1(34.5,29.25) 33.991,28.741 33.991,26.259 v1(35.75,24.5)
I2C_SCK: R206.1 U201.4 U300.13 | length 27.9
  L1 (Signal) w0.2: U201.4 27.275,12.575 27.275,12.005 27.65,11.63 27.65,10.85 29,9.5 35.75,9.5 37,8.25 R206.1 39.5,7.329 39.617,7.212 41.712,7.212 42.204,7.704 42.204,11.704 42.75,12.25 v1(42.75,13) ; v1(42.75,15.5) 42.885,15.5 43.135,15.75 U300.13
  L4 (Signal) w0.2: v1(42.75,13) v1(42.75,15.5)
I2C_SDA: R207.1 U201.5 U300.14 | length 21.4
  L1 (Signal) w0.2: U201.5 27.775,12.575 27.775,12.071 28.05,11.796 28.05,11.016 29.066,10 38,10 38.5,9.5 R207.1 39.5,11.063 43.687,15.25 U300.14
IMU_INT1: U201.12 U300.4 | length 19.2
  L1 (Signal) w0.2: U201.12 32.53,14.75 33,14.28 33,14 33.25,13.75 39.5,13.75 v1(40,13.25) ; U300.4 45.5,14.438 45.75,14.188 v1(45.75,13.5)
  L4 (Signal) w0.2: v1(40,13.25) 41.5,11.75 43,11.75 44,12.75 45,12.75 v1(45.75,13.5)
LNA_IN: C210.2 L201.2 U201.1 | length 5.1
  L1 (Signal) w0.348: L201.2 C210.2 24.5,10.5 ccw(c24.5,10.75) 24.75,10.75 24.75,11.5 cw(c25.25,11.5) 25.25,12 ccw(c25.25,12.5) 25.75,12.5 U201.1
MT0_OUT1: J400.1 U400.2 | length 3.3
  L1 (Signal) w0.2: U400.2 40.7,28.75 40.75,28.7
  L1 (Signal) w0.8: 40.75,28.7 40.831,28.7 41.056,28.925 42.175,28.925 J400.1
MT0_OUT2: J401.1 U400.3 | length 4.7
  L1 (Signal) w0.2: U400.3 40.25,29.25 40.5,29.5
  L1 (Signal) w0.4: 40.5,29.5 40.75,29.75 40.75,30.25
  L1 (Signal) w0.6: 40.75,30.25 40.75,31
  L1 (Signal) w1: J401.1 40.537,32.463 40.537,31.213 40.75,31
NetC211_2: C211.2 JP200.2 JP201.2 U202.2 | length 6.6
  L1 (Signal) w0.5: U202.2 45.237,21.512 46.237,21.512 C211.2 46.25,23 v1(45.75,23.5)
  L4 (Signal) w0.5: JP201.2 JP200.2 44.505,24.245 44.951,24.245 45.696,23.5 v1(45.75,23.5)
NetJP100_1: JP100.1 Q100.2 | length 3.9
  L1 (Signal) w1: Q100.2 21.25,37.85 21.25,38.5 22,39.25 v1(22.428,39.25)
  L4 (Signal) w0.5: 22,40 JP100.1
  L4 (Signal) w1: 22,40 22,39.679 v1(22.428,39.25)
NR_PIN: C102.2 U100.4 | length 2.4
  L1 (Signal) w0.5: C102.2 23,34.9 23.23,34.67 U100.4
PULLUP_IO2: JP203.2 R214.1 | length 2
  L1 (Signal) w0.2: v1(32.25,8.5) R214.1
  L4 (Signal) w0.2: JP203.2 v1(32.25,8.5)
PULLUP_IO8: JP202.2 R213.1 | length 2.3
  L1 (Signal) w0.2: R213.1 33.25,16 v1(33.75,15.5)
  L4 (Signal) w0.2: JP202.2 33.365,15.25 33.615,15.5 v1(33.75,15.5)
PWM_CH0: U201.8 U400.6 | length 36
  L1 (Signal) w0.2: U201.8 29.963,12.6 31.063,11.5 38,11.5 v1(38.75,12.25) ; U400.6 37,29.25 36.5,29.75 35.75,29.75 35.5,29.5 35.5,26.25 36.5,25.25 40,25.25 40.25,25 42,23.25 42,18 v1(38.75,14.75)
  L4 (Signal) w0.2: v1(38.75,12.25) v1(38.75,14.75)
PWM_CH1: U201.9 U400.5 | length 34.3
  L1 (Signal) w0.2: U201.9 29.925,13.225 30.314,13.225 30.546,12.993 30.546,12.708 30.979,12.275 37.444,12.275 v1(37.524,12.355) ; v1(35.5,30.75) 36.425,30.75 37.4,29.775 37.525,29.775 U400.5 ; v1(37.606,15.073) 39.367,16.834 39.584,16.834 41.25,18.5 41.25,22.5 39.25,24.5 v1(38,24.5)
  L4 (Signal) w0.2: v1(35.5,30.75) 35.5,26.25 37.25,24.5 v1(38,24.5) ; v1(37.524,12.355) 37.565,12.396 37.565,15.032 v1(37.606,15.073)
PWR_LED_K: D100.K R100.2 | length 2.7
  L1 (Signal) w0.6: D100.K 32.35,40.3 33.55,41.5 R100.2
SLEEP_DRV0: R400.1 U400.7 | length 1.3
  L1 (Signal) w0.2: R400.1 U400.7
SPI_CS: U200.1 U201.21 | length 17.1
  L1 (Signal) w0.2: U201.21 27.25,18.619 29.316,20.684 29.934,20.684 30.889,21.639 30.889,23.336 31.303,23.75 31.383,23.75 31.5,23.867 31.5,28 33.405,29.905 U200.1
SPICLK_FLASH: R202.2 U200.6 | length 2.3
  L1 (Signal) w0.2: R202.2 30.05,23 30.25,23.2 30.25,23.77 30.865,24.385 U200.6
SPICLK_MCU: R202.1 U201.22 | length 6.2
  L1 (Signal) w0.2: U201.22 26.75,18.684 29.316,21.25 29.75,21.25 30,21.5 R202.1
SPID_FLASH: R200.2 U200.5 | length 2.3
  L1 (Signal) w0.2: R200.2 28.94,23.19 28.94,23.44 29.45,23.95 29.45,24.79 U200.5
SPID_MCU: R200.1 U201.23 | length 5.6
  L1 (Signal) w0.2: U201.23 26.25,18.75 28.75,21.25 R200.1
SPIHD_FLASH: R203.2 U200.7 | length 7.7
  L1 (Signal) w0.2: U200.7 32.191,24.991 32.191,26.365 v1(32.248,26.421) ; R203.2 v1(34.25,23)
  L4 (Signal) w0.2: v1(32.248,26.421) 32.248,23.502 32.75,23 v1(34.25,23)
SPIHD_MCU: R203.1 U201.19 | length 7.5
  L1 (Signal) w0.2: U201.19 28.25,18.434 29.7,19.884 30.884,19.884 32.5,21.5 32.7,21.5 33.2,22 R203.1
SPIQ_FLASH: R201.2 U200.2 | length 10.5
  L1 (Signal) w0.2: R201.2 27.55,23 27.75,23.2 27.75,23.25 28.75,24.25 28.75,26.25 32.135,29.635 U200.2
SPIQ_MCU: R201.1 U201.24 | length 5.3
  L1 (Signal) w0.2: U201.24 25.75,19 27.5,20.75 R201.1
SPIWP_FLASH: R204.2 U200.3 | length 10.2
  L1 (Signal) w0.2: U200.3 30.872,31.558 30.872,30.143 v1(30.879,30.136) ; R204.2 31.8,23 32.767,23.967 32.767,25.827 33.25,26.31 v1(33.25,27.25)
  L4 (Signal) w0.2: v1(30.879,30.136) 30.975,30.041 30.975,29.525 v1(33.25,27.25)
SPIWP_MCU: R204.1 U201.20 | length 6.8
  L1 (Signal) w0.2: U201.20 27.75,18.5 29.534,20.284 30.469,20.284 31.584,21.4 31.584,21.834 R204.1
USB_CONN_N: J200.A7 J200.B7 R208.2 | length 7.3
  L1 (Signal) w0.281: J200.A7 16.07,31.421 15.683,31.645 15.574,31.754 15.574,31.945 15.845,32.414 15.953,32.522 16.144,32.522 16.442,32.352 16.566,32.281 J200.B7 J200.B7@17.615,31.662 ; J200.B7@17.616,31.662 17.737,31.592 cw(c17.568,31.296) 17.801,31.544 ccw(c17.991,31.752) 17.846,31.511 18.005,31.415 cw(c17.758,31.002) 18.088,31.353 18.173,31.272 ccw(c18.366,31.477) 18.219,31.237 18.482,31.077 18.712,31.077 19.367,30.422 19.367,29.824 19.532,29.659 19.591,29.659 R208.2
USB_CONN_P: J200.A6 J200.B6 R209.2 | length 6.8
  L1 (Signal) w0.281: J200.B6 16.876,30.379 17.301,30.134 17.493,30.134 17.601,30.242 17.867,30.702 17.867,30.894 17.86,30.901 ; J200.A6 J200.A6@17.366,31.229 ; J200.A6 J200.A6@17.366,31.229 ; R209.2 18.659,29.659 18.718,29.659 18.883,29.824 18.883,30.222 18.685,30.42 18.472,30.42 18.274,30.618 18.266,30.626 ccw(c18.065,30.43) 18.217,30.666 17.953,30.837 cw(c18.366,31.477) 17.93,30.852 17.86,30.901 ; J200.A6@17.366,31.229 17.489,31.157 ; J200.A6@17.366,31.229 17.488,31.158 cw(c17.318,30.863) 17.489,31.157 ; 17.489,31.157 cw(c17.318,30.863) 17.512,31.143 17.86,30.901 ; 17.489,31.157 17.758,31.002 17.86,30.901
USB_N: D200.6 U201.25 | length 10
  L1 (Signal) w0.281: D200.6 20.2,22 19.891,21.691 19.891,21.603 19.492,21.204 19.492,20.972 19.714,20.75 22.701,20.75 24.484,18.966 24.484,17.172 24.906,16.75 U201.25
USB_P: D200.4 U201.26 | length 10.9
  L1 (Signal) w0.281: D200.4 18.3,22 18.609,21.691 18.609,21.603 19.008,21.204 19.008,20.771 19.513,20.266 22.5,20.266 24,18.766 24,16.901 24.635,16.266 25.084,16.266 U201.26
USB_RES_N: C215.2 D200.1 R208.1 | length 5
  L1 (Signal) w0.281: R208.1 19.591,28.341 19.532,28.341 19.367,28.176 19.367,27.483 20,26.85 C215.2 20,26.65 19.741,26.391 19.532,26.391 19.367,26.226 19.367,25.945 19.891,25.422 19.891,25.309 20.2,25 D200.1
USB_RES_P: C214.2 D200.3 R209.1 | length 4.9
  L1 (Signal) w0.281: D200.3 18.459,24.859 18.459,25.522 18.883,25.945 18.883,26.226 18.718,26.391 18.509,26.391 18.25,26.65 C214.2 18.25,26.85 18.883,27.483 18.883,28.176 18.718,28.341 18.659,28.341 R209.1
USR_LED: U201.13 U202.1 | length 18.4
  L1 (Signal) w0.2: U201.13 32.854,15.25 33.735,14.369 35.119,14.369 v1(40.25,19.5) ; v1(44.25,20.25) 44.262,20.262 44.262,21.512 U202.1
  L4 (Signal) w0.2: v1(40.25,19.5) 41,20.25 v1(44.25,20.25)
VBAT: J100.1 Q100.3
VBUS: D200.5 FB100.1 J200.A4B9 J200.B4A9 JP100.2 | length 36.6
  L1 (Signal) w0.5: J200.A4B9 18.351,33.153 19.116,32.711 19.15,32.745 ; v1(18.25,23.5) 18.288,23.462 18.631,23.462 19.2,22.892 19.2,22.35 D200.5 ; v1(19.25,31.75) 19.212,31.788 19.212,32.684 19.15,32.745 ; v1(20.25,32.75) 20.245,32.745 19.15,32.745
  L1 (Signal) w0.6: J200.B4A9 15.851,29.054 16.168,28.872 ccw(c16.418,29.305) 16.171,28.869 v1(17.121,28.332)
  L1 (Signal) w1: v1@20.245,32.745 v1(19.25,31.75) v1(20.25,31.75) v1(20.25,32.75) ; FB100.1 FB100.1@23.55,38.15 ; FB100.1@23.55,38.15 23.55,38.8 v1(24,39.25) 24,38.6 FB100.1@23.55,38.15
  L4 (Signal) w0.5: JP100.2 23.25,40.75
  L4 (Signal) w1: v1(18.25,23.5) 18.25,27.203 v1(17.121,28.332) 19.25,30.461 v1(19.25,31.75) v1(20.25,31.75) v1(20.25,32.75) 22,32.75 24,34.75 v1(24,39.25) 24,40 23.25,40.75
VCC: C100.2 C101.2 C400.2 FB100.2 JP200.1 U100.1 U100.5 U400.1 | length 32.6
  L1 (Signal) w0.2: U400.1 39.575,28.25 39.75,28.075 39.75,28
  L1 (Signal) w0.3: U100.5 22,32.765 22,35.548 22.452,36 25.75,36 ; 39.75,27.75 39.75,28
  L1 (Signal) w0.5: v1(39.75,26.004) 39.75,27.75
  L1 (Signal) w0.8: C101.2 29.6,37 30.1,36.5 31.5,36.5 v1(32.5,35.5)
  L4 (Signal) w0.5: v1(39.75,26.004) 39.754,26 42.071,26 42.571,26.5 44,26.5 44.5,26 JP200.1
  L4 (Signal) w0.8: v1(32.5,35.5) 35,33 37.242,33 38.496,31.746 38.496,29.5 39.75,28.246 v1(39.75,26.004)
VDD3P3_FILT: C208.2 L200.2 U201.2 U201.3 | length 3.9
  L1 (Signal) w0.2: 26.25,11.75 U201.2 ; 26.75,11.75 U201.3
  L1 (Signal) w0.4: L200.2 26.05,11.25 26.15,11.35 26.15,11.4 26.25,11.5 26.25,11.75 ; 26.75,11.75 26.75,11.5 26.85,11.4 26.85,11.35 26.95,11.25 C208.2
  L1 (Signal) w0.5: L200.2@26.05,11.25 C208.2@26.95,11.25
VDD_SPI: C200.2 U200.8 U201.18 | length 14.2
  L1 (Signal) w0.2: U201.18 28.75,18.25 29.75,19.25 31,19.25 31.154,19.404 31.654,19.404 v1(31.75,19.5)
  L1 (Signal) w0.5: U200.8 33.405,24.458 33.455,24.408 34.511,24.408 v1(34.514,24.405) 34.552,24.444 34.552,25.302 34.65,25.4 34.65,25.45 34.7,25.5 C200.2
  L4 (Signal) w0.4: v1(31.75,19.5) 34.25,22 34.75,22 35.25,22.5 35.25,23.669 v1(34.514,24.405)
XTAL_N: C212.1 U201.29 X200.1 | length 9.5
  L1 (Signal) w0.2: X200.1 17.8,17.8 18.85,16.75 20.7,16.75 21.2,17.25 C212.1 22.75,17.25 23.25,16.75 23.25,16 24.5,14.75 U201.29
XTAL_P: R205.2 U201.30 | length 2.9
  L1 (Signal) w0.2: R205.2 23.5,15 24.25,14.25 U201.30
XTAL_P_RES: C213.1 R205.1 X200.3 | length 3
  L1 (Signal) w0.2: X200.3 20.1,16 C213.1 R205.1
pads on no net: J200.A8 J200.B8 J200.MH J200.SH U201.10 U201.16 U201.27 U201.28 U202.3 U300.9

## Polygon pours and split planes (outlines as drawn)
GND on L1 (Signal) "GND_L01_P005" (solid, pour order 5): 22.75,27.75 22.75,25.75 22.25,25.25 22.25,24.5 22.75,24 27,24 28,25 28,27.5 27.25,28.25 23.25,28.25
3V3 on L1 (Signal) "3V3_L01_P002" (solid, pour order 2): 25.5,34 26,34 26.25,33.75 26.25,31 26.5,30.75 27,30.75 27.25,30.5 27.25,29 27,28.75 22.25,28.75 22,29 22,30.5 22.5,31 25.25,31 25.25,33.75
VCC on L1 (Signal) "VCC_L01_P001" (solid, pour order 1): 25,38.75 24.75,38.5 24.75,36.5 26.5,34.75 26.5,31.5 26.75,31.25 27.25,31.25 27.575,31.575 27.575,35.152 28.699,36.276 30.276,36.276 30.5,36.5 30.5,37.5 30.25,37.75 29,37.75 28.25,38.5 26.25,38.5 26,38.75
VBAT on L1 (Signal) "VBAT_L01_P000" (solid, pour order 0): 19.5,40.75 19.5,39.5 19.75,39.25 20.75,39.25 21,39.5 21,42.75 20,43.75 18.25,42 19.25,41
GND on L2 (GND) "GND_L02_P003" (solid, pour order 3): 0,52 0,0 53.75,0 52,1.75 52,52
GND on L3 (GND) "GND_L03_P004" (solid, pour order 4): 0.75,51 0.75,0.75 1.5,0 52.5,0 52.5,49 50.25,51.25

## Keep-outs
L2 (GND):
  region: 0.106,6.106 0,6 0,0 52.144,0 52.144,6.106
  region: 44.182,16.538 44.182,14.937 44.191,14.928 45.319,14.928 45.319,16.532 45.316,16.535
L3 (GND):
  region: 0.106,6.106 0,6 0,0 52.144,0 52.144,6.106
  region: 44.184,16.537 44.183,16.536 44.183,14.933 45.312,14.933 45.319,14.926 45.319,16.534

## Silkscreen, mask and mechanical layers (free items; w line width, h text height)
Top Overlay:
  circle w0.25: c13.8,6.95 r0.125
  circle w0.254: c13.8,6.95 r0.6
  lines w0.3: 11.592,6.54 11.1,6.95 ; 11.592,7.36 11.1,6.95 ; 13.1,6.95 11.1,6.95 ; 13.375,9.078 13.785,9.57 ; 13.785,7.57 13.785,9.57 ; 14.194,9.078 13.785,9.57
  text "+" at 20.092,44.133 h1
  text "+3V3" at 30.442,43.423 h0.5
  text "-" at 16.492,41.25 h1
  text "MT+" at 39.234,34.5 h0.5
  text "MT-" at 41.759,31 h0.5
  text "JLCJLCJLCJLC" at 9.575,11.625 h0.8 r90
  text "x" at 13.94,10.11 h0.5 r90
  text "z" at 15.24,6.81 h0.5 r90
  text "Y" at 10.54,6.76 h0.5 r90
Bottom Overlay:
  drawing of 11 lines, arcs and shapes, not listed
  text "VBUS" at 25.841,40.425 h0.5
  text "LED PWR" at 41.125,23.034 h0.5 r270
  text "3V3" at 42.15,21.934 h0.5 r270
  text "VCC" at 44.275,21.909 h0.5 r270
  text "DESIGNED IN MEXICO BY" at 14.94,17.75 h0.5
  text "CARLOS A. VASQUEZ" at 13.124,16.825 h0.5
  text "GLUONS@ZOHOMAIL.COM" at 15.477,15.9 h1.1
  text "IO8" at 32.85,13.675 h0.5
  text "IO2" at 31.275,7.025 h0.5
  text "⋆⭒˚｡⋆☆⋆⭒˚｡⋆" at 37.368,2.245 h5
Top Courtyard:
  lines w0.1: 0.25,6.745 cw(c50.25,6.758) 25.249,50.059 ; 0.254,6.752 ccw(c25.258,50.042) 50.25,6.745 ccw(c0.25,6.745) 25.252,50.045

## Text inside footprints (layer, text, board x,y; h text height)
D100: Mechanical 13 "+" at 31,43.017 h1 r90